# Altium PCB quark_dog_control.PcbDoc (part 2 of 2)
Units mm, origin at the board's own origin, x right, y up, seen from the top; angles counter-clockwise.
Board outline 100 x 60 mm, 4 copper layers (Top Layer 1, GND, VCC, Bottom Layer 1), stack 0.603 mm thick; 105 components, 131 nets, 600 pads, 305 vias.
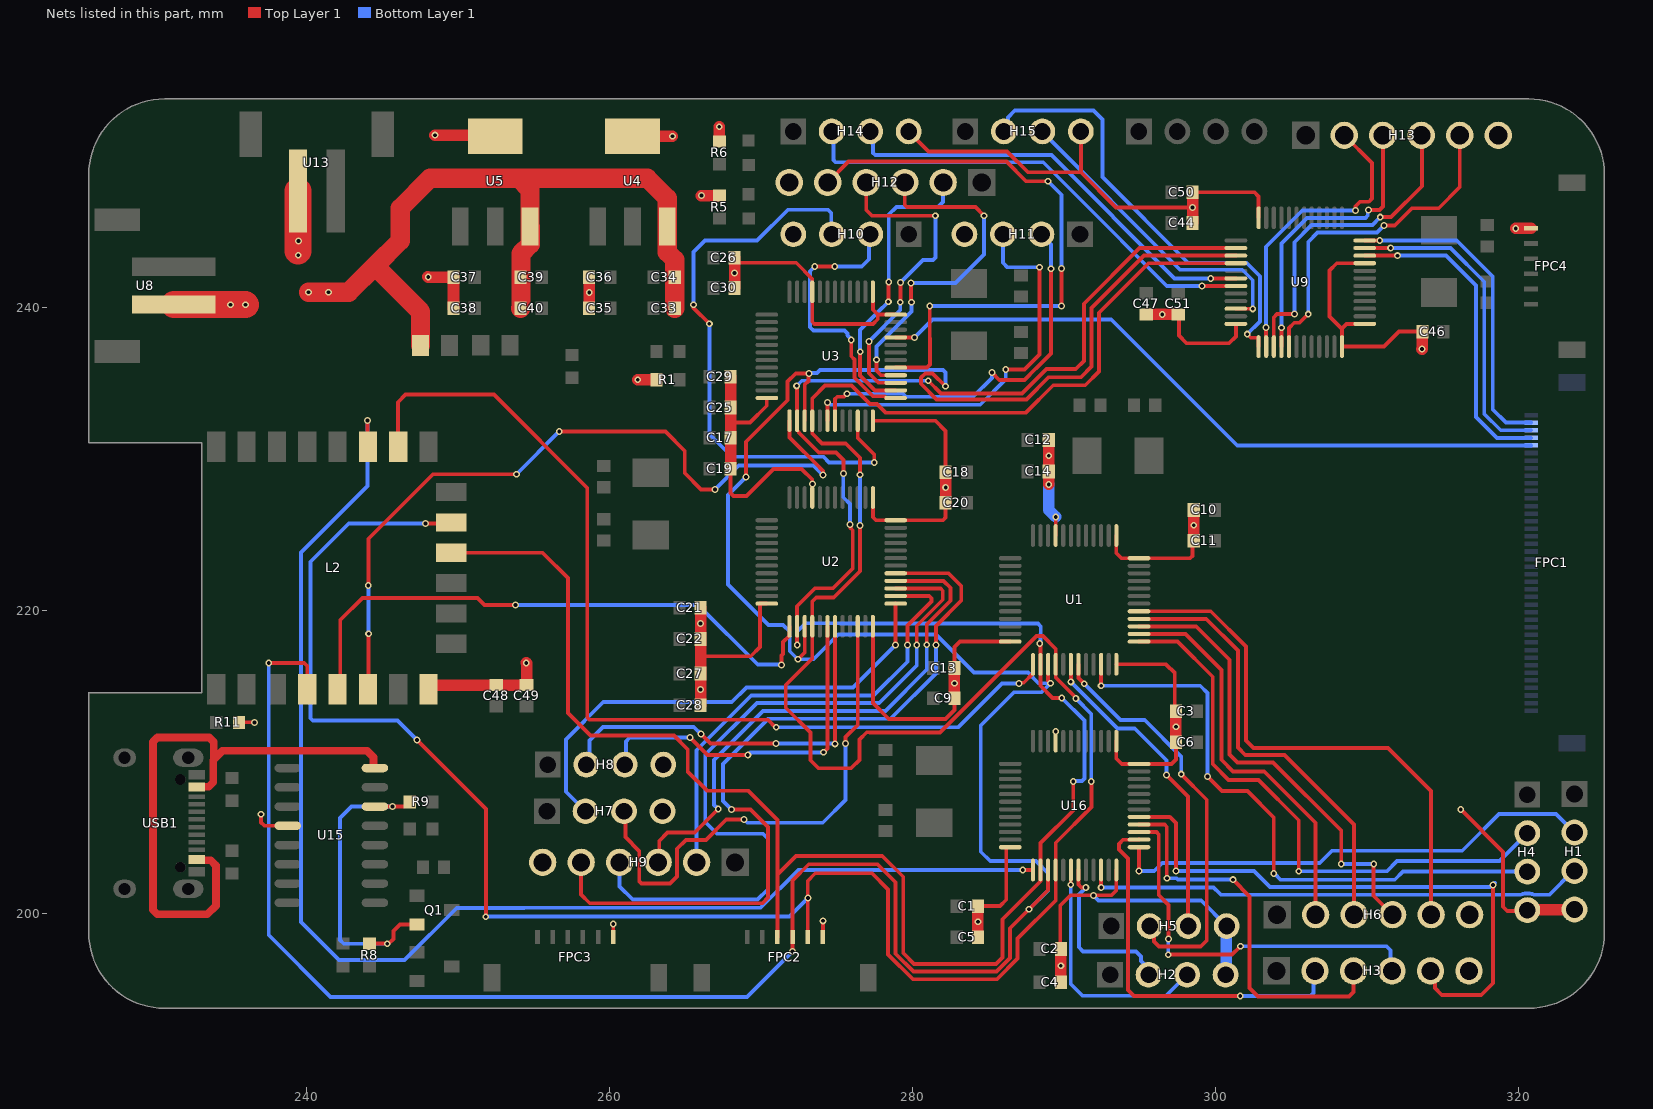
[diagram p4: the nets of this part, all layers, seen from the top]

## Via types
v1: diameter 0.45, hole 0.25, Top Layer 1 to Bottom Layer 1, tented both sides, 301 vias
v2: diameter 2, hole 2, Top Layer 1 to Bottom Layer 1, 4 vias

## Nets (pads, with @x,y where several pads share a name; then routed paths per layer and width w, separated by ;. In a path a pad name is that pad's centre, name@x,y a point inside that pad or via, vN(x,y) a via of type N, cw(c..) or ccw(c..) an arc to the next point about the centre after c; other vN are vias at no path point) (continued)
PWM12_3: FPC1.5 U3.45 | length 45.9
  Top Layer 1 w0.254: U3.45@278.88,238 280.11,238 v1(280.12,237.99)
  Bottom Layer 1 w0.254: v1(280.12,237.99) 281.31,239.18 293.11,239.18 301.42,230.87 FPC1.5@320.81,230.87
PWM13_1: FPC1.4 U9.10 | length 21
  Top Layer 1 w0.254: U9.10@309.83,243.39 v1(312,243.39)
  Bottom Layer 1 w0.254: v1(312,243.39) 315.2,243.39 317.18,241.41 317.18,232.736 318.546,231.37 FPC1.4@320.81,231.37
PWM13_2: FPC1.3 U9.11 | length 21.1
  Top Layer 1 w0.254: U9.11@309.83,243.89 v1(311.54,243.89)
  Bottom Layer 1 w0.254: v1(311.54,243.89) 315.5,243.89 317.72,241.67 317.72,232.95 318.8,231.87 FPC1.3@320.81,231.87
PWM13_3: FPC1.2 U9.12 | length 21.1
  Top Layer 1 w0.254: U9.12@309.83,244.39 v1(310.82,244.39)
  Bottom Layer 1 w0.254: v1(310.82,244.39) 315.9,244.39 318.28,242.01 318.28,233.23 319.14,232.37 FPC1.2@320.81,232.37
RTS: Q1.2 R8.2 R9.2 U15.14 | length 21.4
  Top Layer 1 w0.254: R8.2@244.17,197.996 245.436,197.996 245.75,198.31 245.75,198.83 246.18,199.26 Q1.2@247.29,199.26 ; U15.14@244.523,207.045 246.405,207.045 246.42,207.06 246.541,207.06 246.817,207.336 R9.2@246.817,207.35
  Bottom Layer 1 w0.254: v1(245.34,197.99) 242.47,197.99 242.22,198.24 242.22,206.28 242.98,207.04 v1(245.69,207.04)
SPI_CS1: L2.17 U16.25 | length 88.4
  Top Layer 1 w0.254: v1(244.03,232.52) 244.03,230.82 L2.17@244.06,230.79 ; v1(287.27,202.86) U16.25@287.94,202.86
  Bottom Layer 1 w0.254: v1(244.03,232.52) 244.03,228.19 239.65,223.81 239.65,199.43 242.16,196.92 246.48,196.92 249.92,200.36 254.36,200.36 254.37,200.37 269.97,200.37 272.46,202.86 v1(287.27,202.86)
SPI_CS1_1: H3.2 U16.38 | length 25.3
  Top Layer 1 w0.254: U16.38@294.94,204.86 294.937,204.857 293.897,204.857 293.61,204.57 293.61,204.22 294.22,203.61 294.22,194.93 294.6,194.55 v1(301.62,194.55)
  Bottom Layer 1 w0.254: v1(301.62,194.55) 306.26,194.55 306.45,194.74 306.45,196.1 H3.2@306.55,196.2
SPI_CS2: L2.16 U1.25 | length 65.1
  Top Layer 1 w0.254: L2.16@246.06,230.79 246.05,230.8 246.05,233.72 246.55,234.22 252.38,234.22 258.53,228.07 258.53,212.919 258.679,212.77 270.463,212.77 270.963,212.27 v1(271,212.27) ; v1(287.022,215.169) 287.06,215.207 287.335,215.207 287.94,215.812 U1.25@287.94,216.427
  Bottom Layer 1 w0.254: v1(271,212.27) 283,212.27 285.899,215.169 v1(287.022,215.169)
SPI_CS2_1: H6.2 U1.38 | length 26.3
  Top Layer 1 w0.254: U1.38@294.94,218.427 298.013,218.427 300.38,216.06 300.38,210.13 301.15,209.36 303.2,209.36 306.59,205.97 H6.2@306.59,199.91
SPI_CS3: L2.5 U2.25 | length 38.9
  Top Layer 1 w0.254: L2.5@242.06,214.79 242.24,214.97 242.24,219.34 243.7,220.8 251.293,220.8 251.753,220.34 v1(253.8,220.34) ; v1(271.354,216.379) 271.354,217.016 271.45,217.112 271.45,217.889 271.875,218.313 271.875,218.928 U2.25@271.88,218.933
  Bottom Layer 1 w0.254: v1(253.8,220.34) 265.85,220.34 269.78,216.41 271.323,216.41 v1(271.354,216.379)
SPI_CS3_1: H9.2 U2.38 | length 31
  Top Layer 1 w0.254: U2.38@278.88,220.933 281.095,220.933 281.244,220.785 281.244,220.574 279.66,218.99 v1(279.66,217.694)
  Bottom Layer 1 w0.254: H9.2@265.75,203.36 265.75,210.759 269.351,214.36 277.42,214.36 279.66,216.6 v1(279.66,217.694)
SPI_CS4: L2.6 U3.25 | length 50.8
  Top Layer 1 w0.254: L2.6@244.06,214.79 244.111,214.841 v1(244.111,218.439) ; v1(244.09,221.62) 244.09,224.71 248.35,228.97 v1(253.86,228.97) ; v1(256.69,231.78) 263.7,231.78 264.97,230.51 264.97,229.05 266.05,227.97 v1(266.96,227.97) ; U3.25@271.88,232.5 271.88,231.4 273.88,229.4 273.88,229.39 274.09,229.18 v1(274.09,228.91)
  Bottom Layer 1 w0.254: v1@244.09,218.36 v1(244.09,221.62) ; v1(253.86,228.97) 256.67,231.78 v1(256.69,231.78) ; v1(266.96,227.97) 268.53,229.54 273.46,229.54 v1(274.09,228.91)
SPI_CS4_1: H12.2 U3.38 | length 19.4
  Top Layer 1 w0.254: v1(276.54,237.05) 276.54,235.49 277.53,234.5 U3.38@278.88,234.5 ; v1(278.4,240.35) 278.415,240.365 278.415,241.635 v1(278.43,241.65)
  Bottom Layer 1 w0.254: v1(276.54,237.05) 276.54,238.49 277.681,239.631 v1(278.4,240.35) ; v1(278.43,241.65) 278.43,246.11 278.93,246.61 281.68,246.61 282.009,246.939 282.009,248.209 H12.2@282.02,248.22
SPI_CS5_1: H13.2 U9.38 | length 20
  Top Layer 1 w0.254: v1(303.32,238.64) 303.327,238.633 303.327,237.393 U9.38@303.33,237.39 ; H13.2@308.48,251.33 310.31,249.5 310.31,247.158 310.1,246.948 309.518,246.948 309.22,246.65 v1(309.22,246.37)
  Bottom Layer 1 w0.254: v1(303.32,238.64) 303.32,243.98 305.71,246.37 v1(309.22,246.37)
SPI_MISO: FPC2.4 L2.4 U1.27 U2.27 U3.27 U9.27 U16.27 | length 203.6
  Top Layer 1 w0.254: v1(237.52,216.51) 239.86,216.51 240.06,216.31 L2.4@240.06,214.79 ; v1(269.01,228.79) 269.01,231.11 271.75,233.85 271.75,235.08 272.289,235.619 v1(273.16,235.619) 273.122,235.581 273.122,235.129 272.88,234.886 U3.27@272.88,232.5 ; v1(272.07,197.47) 272.08,197.48 FPC2.4@272.08,198.44 272.08,202.17 273.15,203.24 277.69,203.24 278.88,202.05 278.88,197.33 280.059,196.151 285.53,196.151 286.43,197.051 286.43,199.012 v1(287.685,200.267) 288.94,201.522 U16.27@288.94,202.86 ; v1(272.44,216.76) 272.88,217.2 U2.27@272.88,218.933 ; v1(282.17,234.769) 281.32,235.619 280.832,235.619 280.551,235.338 280.551,234.942 281.584,233.909 287.509,233.909 288.97,235.37 291.11,235.37 291.81,236.07 291.81,239.94 295.26,243.39 U9.27@301.33,243.39 ; U1.27@288.94,216.427 288.94,215.34 v1(289.1,215.18)
  Bottom Layer 1 w0.254: v1(237.52,216.51) 237.52,198.56 241.6,194.48 269.08,194.48 v1(272.07,197.47) ; v1(269.01,228.79) 267.83,227.61 267.83,221.7 270.5,219.03 271.44,219.03 271.89,218.58 271.89,217.29 272.42,216.76 v1(272.44,216.76) 273.46,216.76 275.09,218.39 281.55,218.39 284.061,215.879 287.605,215.879 288.304,215.18 v1(289.1,215.18) 288.5,214.58 286.7,214.58 284.5,212.38 284.5,204.062 285.122,203.44 288.13,203.44 288.93,202.64 288.93,201.512 v1(287.685,200.267) ; v1(273.16,235.619) 273.198,235.657 273.7,235.657 273.893,235.85 282.011,235.85 282.17,235.691 v1(282.17,234.769)
SPI_MISO1_1: H3.3 U16.40 | length 25.9
  Top Layer 1 w0.254: U16.40@294.94,205.86 296.621,205.86 296.77,205.711 296.77,202.321 v1(296.78,202.311) ; v1(301.13,202.22) 302.23,201.12 302.23,195.08 302.79,194.52 308.79,194.52 309.08,194.81 309.08,196.19 H3.3@309.09,196.2
  Bottom Layer 1 w0.254: v1(296.78,202.311) 297.422,202.311 297.513,202.22 v1(301.13,202.22)
SPI_MISO2_1: H6.3 U1.40 | length 29.5
  Top Layer 1 w0.254: U1.40@294.94,219.427 299.373,219.427 301.46,217.34 301.46,210.93 301.95,210.44 304.54,210.44 309.13,205.85 H6.3@309.13,199.91
SPI_MISO3_1: H9.3 U2.40 | length 35.9
  Top Layer 1 w0.254: H9.3@263.21,203.36 263.28,203.43 263.28,204.77 263.83,205.32 265.622,205.32 v1(267.176,206.874) ; U2.40@278.88,221.933 282.047,221.933 282.501,221.479 282.501,220.621 280.93,219.05 v1(280.93,217.72)
  Bottom Layer 1 w0.254: v1(267.176,206.874) 266.9,207.15 266.9,210.113 270.137,213.35 278.206,213.35 280.93,216.074 v1(280.93,217.72)
SPI_MISO4_1: H12.3 U3.40 | length 23.3
  Top Layer 1 w0.254: v1(277.61,236.52) 277.61,235.81 277.917,235.503 278.877,235.503 U3.40@278.88,235.5 ; H12.3@279.48,248.22 279.48,246.739 279.629,246.59 284.14,246.59 v1(284.71,246.02) ; v1(279.89,241.58) 279.89,240.34 v1(279.92,240.31)
  Bottom Layer 1 w0.254: v1(277.61,236.52) 277.61,237.4 279.92,239.71 v1(279.92,240.31) ; v1(279.89,241.58) 282.83,241.58 284.71,243.46 v1(284.71,246.02)
SPI_MISO5_1: H13.3 U9.40 | length 19.4
  Top Layer 1 w0.254: U9.40@304.33,237.39 304.333,237.393 304.333,238.623 v1(304.34,238.63) ; v1@310.06,246.39 v1(310.069,246.399) 310.079,246.409 310.813,246.409 311.03,246.626 311.03,251.32 H13.3@311.02,251.33
  Bottom Layer 1 w0.254: v1(304.34,238.63) 304.34,244.2 306.02,245.88 309.883,245.88 310.032,246.029 310.032,246.362 v1(310.069,246.399)
SPI_MOSI: FPC2.5 L2.13 U1.28 U2.28 U3.28 U9.28 U16.28 | length 196.8
  Top Layer 1 w0.254: v1(247.3,211.43) 251.86,206.87 251.86,199.79 v1(251.84,199.77) ; v1(247.87,225.72) 249.49,225.72 L2.13@249.56,225.79 ; FPC2.5@273.08,198.44 273.08,201 273.08,202.14 273.58,202.64 277.32,202.64 278.38,201.58 278.38,197.291 280.02,195.651 285.568,195.651 286.93,197.012 286.93,198.34 289.44,200.85 U16.28@289.44,202.86 289.44,204.65 291.8,207.01 291.8,208.68 v1(291.79,208.69) ; v1(276.528,225.578) 276.528,222.568 274.8,220.84 273.64,220.84 273.38,220.58 U2.28@273.38,218.933 273.38,216.82 271.63,215.07 271.63,213.56 273.26,211.93 273.26,210.1 273.79,209.57 275.94,209.57 276.49,210.12 276.49,211.46 276.975,211.945 277.185,211.945 277.2,211.93 281.81,211.93 288.168,218.288 288.592,218.288 289.44,217.44 U1.28@289.44,216.427 289.443,216.424 289.443,215.557 290.732,214.268 290.732,214.208 v1(290.77,214.17) ; v1(276.53,228.93) 276.53,230.06 275.59,231 274.03,231 273.38,231.65 U3.28@273.38,232.5 273.38,233.97 274.23,234.82 275.97,234.82 277.19,233.6 277.66,233.6 278.24,233.02 287.46,233.02 289.28,234.84 291.39,234.84 292.3,235.75 292.3,239.62 295.57,242.89 U9.28@301.33,242.89
  Bottom Layer 1 w0.254: v1(247.3,211.43) 246.01,212.72 240.42,212.72 240.271,212.869 240.271,223.191 242.8,225.72 v1(247.87,225.72) ; v1(251.84,199.77) 251.85,199.78 271.88,199.78 v1(273.1,201) ; v1@276.529,225.579 v1(276.53,228.93) ; v1(290.77,214.17) 291.79,213.15 v1(291.79,208.69)
SPI_MOSI1_1: H3.4 U16.39 | length 26
  Top Layer 1 w0.254: U16.39@294.94,205.36 296.08,205.36 296.24,205.2 296.24,201.2 296.89,200.55 v1(296.89,198.31) ; v1(296.87,197.27) 301.07,197.27 v1(301.63,197.83)
  Bottom Layer 1 w0.254: v1(296.87,197.27) 296.87,198.29 v1(296.89,198.31) ; v1(301.63,197.83) 311.26,197.83 311.53,197.56 311.53,196.3 H3.4@311.63,196.2
SPI_MOSI2_1: H6.4 U1.39 | length 30.8
  Top Layer 1 w0.254: U1.39@294.94,218.927 298.713,218.927 300.91,216.73 300.91,210.47 301.43,209.95 303.79,209.95 308.28,205.46 v1(308.28,203.249) ; v1(310.42,203.249) 310.42,201.16 H6.4@311.67,199.91
  Bottom Layer 1 w0.254: v1(308.28,203.249) v1(310.42,203.249)
SPI_MOSI3_1: H9.4 U2.39 | length 49.6
  Top Layer 1 w0.254: U2.39@278.88,221.433 281.841,221.433 281.99,221.284 281.99,220.69 280.27,218.97 v1(280.27,217.697)
  Bottom Layer 1 w0.254: H9.4@260.67,203.36 260.67,201.769 261.539,200.9 269.76,200.9 270.45,201.59 270.45,204.94 270.14,205.25 267.09,205.25 266.32,206.02 266.32,210.466 269.734,213.88 277.803,213.88 280.27,216.347 v1(280.27,217.697)
SPI_MOSI4_1: H12.4 U3.39 | length 21.2
  Top Layer 1 w0.254: H12.4@276.94,248.22 276.94,246.4 277.32,246.02 v1(281.5,246.02) ; v1(277.12,237.73) 277.12,235.627 277.747,235 U3.39@278.88,235 ; v1(279.18,240.32) 279.2,240.34 v1(279.2,241.62)
  Bottom Layer 1 w0.254: v1(277.12,237.73) 279.18,239.79 v1(279.18,240.32) ; v1(279.2,241.62) 280.69,243.11 281.351,243.11 281.5,243.259 v1(281.5,246.02)
SPI_MOSI5_1: H13.4 U9.39 | length 21.4
  Top Layer 1 w0.254: U9.39@303.83,237.39 303.83,239.32 304.05,239.54 v1(305.19,239.54) ; v1(310.853,245.93) 311.56,245.93 313.6,247.97 313.6,251.29 H13.4@313.56,251.33
  Bottom Layer 1 w0.254: v1(305.19,239.54) 305.19,244.27 306.33,245.41 310.333,245.41 v1(310.853,245.93)
SPI_SCK: FPC2.3 L2.12 U1.26 U2.26 U3.26 U9.26 U16.26 | length 164.5
  Top Layer 1 w0.254: L2.12@249.56,223.79 253.637,223.79 255.59,223.79 257.26,222.12 257.26,213.22 258.76,211.72 264.26,211.72 265.16,210.82 265.16,209.36 266.43,208.09 269.15,208.09 271.08,206.16 271.08,202.57 ; FPC2.3@271.08,198.44 271.08,202.57 ; v1(272.35,234.8) 272.377,234.773 272.377,232.503 U3.26@272.38,232.5 272.38,231.881 272.491,231.77 272.491,231.724 273.805,230.41 274.94,230.41 275.44,229.91 v1(275.44,229.01) ; v1(272.385,217.705) 272.383,217.708 272.383,218.931 U2.26@272.38,218.933 272.38,220.26 273.57,221.45 274.75,221.45 276.05,222.75 276.05,225.27 275.9,225.42 275.9,225.621 v1(275.862,225.658) ; v1(281.03,235.14) 281.88,234.29 287.22,234.29 288.83,235.9 290.76,235.9 291.3,236.44 291.3,240.22 294.97,243.89 U9.26@301.33,243.89 ; v1(288.394,217.809) 288.394,217.756 288.44,217.709 288.44,215.01 289.24,214.21 v1(289.84,214.21) ; v1(290.598,208.698) 290.598,206.788 288.44,204.63 U16.26@288.44,202.86 288.437,202.857 288.437,202.117 285.93,199.61 285.93,197.09 285.491,196.651 280.098,196.651 279.38,197.369 279.38,202.41 278,203.79 272.3,203.79 271.08,202.57
  Bottom Layer 1 w0.254: v1(272.35,234.8) 272.69,235.14 v1(281.03,235.14) ; v1(272.385,217.705) 272.37,217.721 272.37,218.59 272.92,219.14 275.22,219.14 275.24,219.12 288.27,219.12 288.45,218.94 288.45,218.429 288.431,218.41 288.431,217.847 v1(288.394,217.809) ; v1(275.44,229.01) 275.42,228.99 275.42,227.45 275.862,227.008 v1(275.862,225.658) ; v1(289.84,214.21) 291.34,212.71 291.34,208.89 291.185,208.735 290.635,208.735 v1(290.598,208.698)
SPI_SCK1_1: H3.5 U16.41 | length 39.5
  Top Layer 1 w0.254: U16.41@294.94,206.36 296.97,206.36 297.38,205.95 297.38,202.8 v1(297.37,202.79) ; H3.5@314.17,196.2 314.466,195.904 314.466,195.064 314.91,194.62 317.52,194.62 318.285,195.385 v1(318.285,201.875)
  Bottom Layer 1 w0.254: v1(297.37,202.79) 302.516,202.79 303.576,201.73 318.14,201.73 v1(318.285,201.875) v1@318.43,202.02
SPI_SCK2_1: H6.5 U1.41 | length 36
  Top Layer 1 w0.254: U1.41@294.94,219.927 299.673,219.927 302,217.6 302,211.41 302.5,210.91 311.37,210.91 314.21,208.07 H6.5@314.21,199.91
SPI_SCK3_1: H9.5 U2.41 | length 53.3
  Top Layer 1 w0.254: H9.5@258.13,203.36 258.13,201.23 258.7,200.66 270.09,200.66 270.46,201.03 270.46,205.7 269.31,206.85 v1(268.05,206.85) ; U2.41@278.88,222.433 282.367,222.433 283.206,221.594 283.206,220.626 281.54,218.96 v1(281.54,217.701)
  Bottom Layer 1 w0.254: v1(268.05,206.85) 267.5,207.4 267.5,209.85 270.49,212.84 278.559,212.84 281.54,215.821 v1(281.54,217.701)
SPI_SCK4_1: H12.5 U3.41 | length 39.2
  Top Layer 1 w0.254: H12.5@274.4,248.22 275.78,249.6 286.19,249.6 287.49,248.3 v1(288.93,248.3) ; U3.41@278.88,236 280.674,236 280.685,236.012 280.942,236.012 281.14,236.21 281.14,237.93 281.13,237.94 v1(281.13,240.07) v1@281.12,240.08 ; v1(289.82,240.07) v1(289.82,242.54)
  Bottom Layer 1 w0.254: v1(281.13,240.07) v1(289.82,240.07) ; v1(288.93,248.3) 289.82,247.41 v1(289.82,242.54)
SPI_SCK5_1: H13.5 U9.41 | length 22.6
  Top Layer 1 w0.254: U9.41@304.83,237.39 304.83,238.61 305.18,238.96 305.53,238.96 v1(306.1,239.53) ; v1(311.11,245.37) 311.81,245.37 312.96,246.52 314.71,246.52 316.1,247.91 H13.5@316.1,251.33
  Bottom Layer 1 w0.254: v1(306.1,239.53) 306.1,244.29 306.72,244.91 310.65,244.91 v1(311.11,245.37)
STM32_RX_1: H2.2 U16.31 | length 11.4
  Top Layer 1 w0.254: U16.31@290.94,202.86 290.943,202.857 290.943,201.897 291.13,201.71 v1(291.43,201.71) v1@291.44,201.72
  Bottom Layer 1 w0.254: v1(291.43,201.71) 290.97,201.25 290.97,197.76 291.24,197.49 294.73,197.49 295.06,197.16 295.06,196.848 295.57,196.337 H2.2@295.57,195.946
STM32_RX_2: H5.2 U1.31 | length 27.6
  Top Layer 1 w0.254: U1.31@290.94,216.427 290.943,216.424 290.943,215.527 v1(291.32,215.15) ; H5.2@295.64,199.16 295.917,198.883 295.917,198.133 296.25,197.8 299.01,197.8 299.41,198.2 299.41,207.49 v1(297.72,209.18)
  Bottom Layer 1 w0.254: v1(291.32,215.15) 293.72,212.75 295.32,212.75 297.72,210.35 v1(297.72,209.18)
STM32_RX_3: H8.2 U2.31 | length 26.5
  Top Layer 1 w0.254: v1(266.04,211.82) 266.66,211.2 v1(270.98,211.2) ; v1(274.88,211.18) U2.31@274.88,218.933
  Bottom Layer 1 w0.254: H8.2@258.47,209.81 258.68,210.02 258.68,211.4 259.58,212.3 265.56,212.3 v1(266.04,211.82) ; v1(270.98,211.2) 274.86,211.2 v1(274.88,211.18)
STM32_RX_4: H11.2 U3.31 | length 25.8
  Top Layer 1 w0.254: U3.31@274.88,232.5 274.88,233.93 275.03,234.08 275.48,234.08 v1(275.68,234.28) ; v1(285.23,235.68) 285.72,235.19 287.381,235.19 288.161,235.97 288.17,235.97 289.13,236.93 v1(289.13,242.53)
  Bottom Layer 1 w0.254: v1(275.68,234.28) 279.367,234.28 279.566,234.081 283.996,234.081 285.23,235.315 v1(285.23,235.68) ; H11.2@288.5,244.8 288.5,244.77 289.13,244.14 v1(289.13,242.53)
STM32_RX_5: H14.2 U9.31 | length 31.9
  Top Layer 1 w0.254: v1(299.1,241.39) U9.31@301.33,241.39
  Bottom Layer 1 w0.254: H14.2@274.66,251.584 274.77,251.474 274.77,249.699 274.919,249.55 288.62,249.55 293.8,244.37 293.8,244.361 296.771,241.39 v1(299.1,241.39)
STM32_TX_1: H2.3 U16.30 | length 16.1
  Top Layer 1 w0.254: v1(290.436,201.887) v1(290.436,201.887) 290.437,202.857 U16.30@290.44,202.86
  Bottom Layer 1 w0.254: v1(290.436,201.887) 290.436,195.344 291.22,194.56 296.724,194.56 H2.3@298.11,195.946
STM32_TX_2: H5.3 U1.30 | length 21.1
  Top Layer 1 w0.254: v1(290.44,215.27) U1.30@290.44,216.427 ; v1(296.76,209.13) 298.18,207.71 H5.3@298.18,199.16
  Bottom Layer 1 w0.254: v1(290.44,215.27) 293.51,212.2 294.66,212.2 296.76,210.1 v1(296.76,209.13)
STM32_TX_3: H8.3 U2.30 | length 23.7
  Top Layer 1 w0.254: v1(265.32,211.6) 266.47,210.45 v1(269.13,210.45) ; v1(274.12,210.62) 274.38,210.88 U2.30@274.38,218.933
  Bottom Layer 1 w0.254: H8.3@261.01,209.81 261.08,209.88 261.08,211.34 261.34,211.6 v1(265.32,211.6) ; v1(269.13,210.45) 269.3,210.62 v1(274.12,210.62)
STM32_TX_4: H11.3 U3.30 | length 27.2
  Top Layer 1 w0.254: v1@274.37,233.71 v1(274.38,233.7) U3.30@274.38,232.5 ; v1(286.15,235.87) 287.38,235.87 288.38,236.87 v1(288.38,242.62)
  Bottom Layer 1 w0.254: v1(274.38,233.7) 274.433,233.7 274.583,233.55 284.46,233.55 286.15,235.24 v1(286.15,235.87) ; H11.3@285.96,244.8 285.96,242.92 286.26,242.62 v1(288.38,242.62)
STM32_TX_5: H14.3 U9.30 | length 28.9
  Top Layer 1 w0.254: v1(299.67,241.89) U9.30@301.33,241.89
  Bottom Layer 1 w0.254: H14.3@277.2,251.584 277.39,251.394 277.39,250.17 277.54,250.02 289.16,250.02 297.29,241.89 v1(299.67,241.89)
SWCLK1: H1.2 U16.37 | length 32.5
  Top Layer 1 w0.254: v1@294.92,202.69 294.94,202.71 U16.37@294.94,204.36
  Bottom Layer 1 w0.254: v1(294.94,202.79) 295.946,202.79 296.466,203.31 306.86,203.31 307.68,204.13 316.26,204.13 318.69,206.56 322.44,206.56 H1.2@323.67,205.33
SWCLK2: H4.2 U1.37 | length 38.3
  Top Layer 1 w0.254: U1.37@294.94,217.927 297.483,217.927 299.8,215.61 299.8,209.85 300.85,208.8 302.82,208.8 305.48,206.14 v1(305.48,202.77)
  Bottom Layer 1 w0.254: v1(305.48,202.77) 311.29,202.77 311.97,203.45 318.72,203.45 H4.2@320.56,205.29
SWCLK3: H7.2 U2.37 | length 32.4
  Top Layer 1 w0.254: U2.37@278.88,220.433 v1(278.88,217.7) v1@278.89,217.69
  Bottom Layer 1 w0.254: H7.2@258.42,206.73 257.13,208.02 257.13,211.47 259.59,213.93 268.07,213.93 269.03,214.89 276.07,214.89 v1(278.88,217.7)
SWCLK4: H10.2 U3.37 | length 18.6
  Top Layer 1 w0.254: v1(273.545,242.675) v1(274.86,242.675) ; v1(275.95,237.831) 275.95,236.755 276.159,236.546 276.159,235.332 277.38,234.111 278.15,234.111 278.261,234 U3.37@278.88,234
  Bottom Layer 1 w0.254: v1(273.545,242.675) 273.23,242.36 273.23,238.67 273.45,238.45 275.51,238.45 275.701,238.259 275.701,238.133 275.95,237.884 v1(275.95,237.831) ; v1(274.86,242.675) 276.645,242.675 277.12,243.15 277.12,244.71 H10.2@277.21,244.8
SWCLK5: H15.2 U9.37 | length 30.2
  Top Layer 1 w0.254: v1(302.08,238.21) 302.314,237.976 302.823,237.976 302.83,237.969 U9.37@302.83,237.39
  Bottom Layer 1 w0.254: H15.2@286.02,251.584 286.297,251.861 286.297,252.517 286.74,252.96 291.94,252.96 292.52,252.38 292.52,248.57 298.19,242.9 302.05,242.9 302.92,242.03 302.92,239.05 v1(302.08,238.21)
SWDIO1: H1.3 U16.34 | length 33.3
  Top Layer 1 w0.254: v1@292.43,201.69 v1(292.44,201.7) U16.34@292.44,202.86
  Bottom Layer 1 w0.254: v1(292.44,201.7) 299.857,201.7 300.263,201.294 300.337,201.22 320.114,201.22 cw(c320.56,200.21) 321.006,201.22 322.01,201.22 323.58,202.79 H1.3@323.67,202.79
SWDIO2: H4.3 U1.34 | length 40.5
  Top Layer 1 w0.254: v1(292.44,215.01) U1.34@292.44,216.427 ; v1(299.46,209.02) 300.42,208.06 302.1,208.06 303.83,206.33 v1(303.83,202.62)
  Bottom Layer 1 w0.254: v1(292.44,215.01) 298.98,215.01 299.46,214.53 v1(299.46,209.02) ; v1(303.83,202.62) 303.867,202.62 304.277,202.21 311.806,202.21 312.346,202.75 H4.3@320.56,202.75
SWDIO3: H7.3 U2.34 | length 34
  Top Layer 1 w0.254: H7.3@260.96,206.73 261.05,206.64 261.05,205.03 261.96,204.12 261.96,202.12 262.12,201.96 263.99,201.96 264.46,202.43 264.46,204.26 265.04,204.84 266.365,204.84 267.705,206.18 v1(268.88,206.18) ; v1(275.58,211.2) 275.58,211.63 276.38,212.43 U2.34@276.38,218.933
  Bottom Layer 1 w0.254: v1(268.88,206.18) 269.09,205.97 274.07,205.97 275.58,207.48 v1(275.58,211.2)
SWDIO4: H10.3 U3.34 | length 39
  Top Layer 1 w0.254: v1(265.55,240.15) 265.55,239.94 v1(266.59,238.9) ; U3.34@276.38,232.5 276.38,231.351 277.47,230.261 v1(277.47,229.75)
  Bottom Layer 1 w0.254: v1(265.55,240.15) 265.55,243.63 266.3,244.38 269.74,244.38 271.78,246.42 274.41,246.42 274.63,246.2 274.63,244.84 H10.3@274.67,244.8 ; v1(266.59,238.9) 266.6,238.89 266.6,231.61 268.09,230.12 274.12,230.12 274.49,229.75 v1(277.47,229.75)
SWDIO5: H15.3 U9.34 | length 21
  Top Layer 1 w0.254: U9.34@301.33,239.89 302.43,239.89 v1(302.44,239.88)
  Bottom Layer 1 w0.254: H15.3@288.56,251.584 288.56,251.55 297.65,242.46 301.75,242.46 302.44,241.77 v1(302.44,239.88)
VCC_3.3: C1.2 C2.2 C3.2 C4.2 C5.2 C6.2 C9.2 C10.2 C11.2 C12.2 C13.2 C14.2 C17.2 C18.2 C19.2 C20.2 C21.2 C22.2 C25.2 C26.2 C27.2 C28.2 C29.2 C30.2 C35.2 C36.2 C44.2 C46.2 C47.2 C50.2 C51.2 H1.4 H2.4 H4.4 H5.4 H7.4 H8.4 H10.4 H11.4 H14.4 H15.4 R1.1 R5.2 U1.1 U1.9 U1.24 U1.36 U1.48 U2.1 U2.9 U2.24 U2.36 U2.48 U3.1 U3.9 U3.24 U3.36 U3.48 U4.4 U9.1 U9.9 U9.24 U9.36 U9.48 U16.1 U16.9 U16.24 U16.36 U16.48 | length 225.1
  Top Layer 1 w0.254: 266.01,216.96 269.32,216.96 269.93,217.57 269.93,220.426 269.937,220.433 U2.24@270.38,220.433 ; C19.2@267.99,229.38 C19.2@267.99,229.33 267.99,227.74 268.19,227.54 269.05,227.54 270.83,229.32 272.68,229.32 273.38,228.62 U2.9@273.38,227.433 ; 267.99,232.374 269.27,232.374 270.38,233.484 U3.24@270.38,234 ; C26.2@268.254,243.198 268.527,242.925 268.67,242.925 268.676,242.92 272.32,242.92 273.38,241.86 U3.9@273.38,241 273.38,239.029 273.529,238.88 277.39,238.88 277.7,239.19 277.7,239.5 ; U2.36@277.38,218.933 277.38,213.87 278.43,212.82 282.161,212.82 282.76,213.419 C9.2@282.76,214.18 ; U2.1@277.38,227.433 277.38,226.13 277.577,225.933 U2.48@278.88,225.933 282.003,225.933 282.18,226.11 C20.2@282.18,227.08 ; U3.36@277.38,232.5 281.51,232.5 282.18,231.83 C18.2@282.18,229.09 ; U3.1@277.38,241 277.38,239.82 277.7,239.5 ; U3.48@278.88,239.5 277.7,239.5 ; H14.4@279.74,251.584 281.054,250.27 286.24,250.27 287.62,248.89 291.1,248.89 ; C13.2@282.76,216.18 282.76,217.56 283.127,217.927 U1.24@286.44,217.927 ; C1.2@284.31,200.47 285.76,200.47 286.18,200.89 286.18,204.353 286.187,204.36 U16.24@286.44,204.36 ; U1.9@289.44,224.927 v1(289.44,226.15) ; C2.2@289.78,197.647 289.74,197.687 289.74,200.51 290.42,201.19 293.13,201.19 293.44,201.5 U16.36@293.44,202.86 ; H15.4@291.1,251.584 291.1,248.89 ; U16.1@293.44,211.36 293.44,210.22 293.8,209.86 U16.48@294.94,209.86 297.08,209.86 297.37,210.15 C6.2@297.37,211.28 ; U1.36@293.44,216.427 296.723,216.427 297.3,215.85 297.3,213.4 C3.2@297.37,213.33 ; U1.1@293.44,224.927 293.44,223.76 293.773,223.427 U1.48@294.94,223.427 298.311,223.427 298.46,223.575 298.46,224.5 C11.2@298.55,224.59 ; C51.2@297.52,239.51 297.57,239.46 297.57,238.11 298.07,237.61 300.88,237.61 301.33,238.06 U9.36@301.33,238.89 ; v1(298.47,246.559) 293.431,246.559 291.1,248.89 ; C50.2@298.47,247.57 302.56,247.57 302.83,247.3 U9.24@302.83,245.89 ; U9.1@309.83,238.89 308.63,238.89 308.33,238.59 ; U9.9@309.83,242.89 307.98,242.89 307.51,242.42 307.51,239.38 308.3,238.59 308.33,238.59 ; C46.2@313.63,238.38 312.09,238.38 311.1,237.39 U9.48@308.33,237.39 308.33,238.59 ; v1(316.17,206.84) 318.96,204.05 318.96,200.43 319.23,200.16 320.51,200.16 H4.4@320.56,200.21
  Top Layer 1 w0.762: C35.2@258.66,239.925 v1(258.66,240.95) C36.2@258.66,241.975 ; U4.4@261.52,251.26 264.14,251.26 v1(264.15,251.27) ; v1@261.86,235.19 v1(261.87,235.2) R1.1@263.107,235.2 ; C28.2@266.01,213.72 v1(266.01,214.77) C27.2@266.01,215.82 266.01,216.96 C22.2@266.01,218.1 v1(266.01,219.125) C21.2@266.01,220.15 ; v1(266.071,247.351) R5.2@267.26,247.351 ; C19.2@267.99,229.38 C17.2@267.99,231.378 267.99,232.374 C25.2@267.99,233.37 C29.2@267.99,235.41 ; C30.2@268.254,241.26 v1(268.254,242.254) C26.2@268.254,243.248 ; C20.2@282.18,227.08 v1(282.18,228.085) C18.2@282.18,229.09 ; C9.2@282.76,214.18 v1(282.76,215.18) C13.2@282.76,216.18 ; C5.2@284.31,198.42 v1(284.31,199.445) C1.2@284.31,200.47 ; v1(288.98,228.3) C14.2@288.98,229.15 v1(288.98,230.19) C12.2@288.98,231.23 ; C4.2@289.78,195.441 v1(289.78,196.544) C2.2@289.78,197.647 ; C47.2@295.42,239.51 v1(296.47,239.51) C51.2@297.52,239.51 ; C6.2@297.37,211.28 v1(297.37,212.305) C3.2@297.37,213.33 ; C44.2@298.47,245.548 v1(298.47,246.559) C50.2@298.47,247.57 ; C11.2@298.55,224.59 v1(298.55,225.6) C10.2@298.55,226.61 ; v1(313.611,237.231) v1(313.611,237.231) 313.611,238.361 C46.2@313.63,238.38 ; H4.4@320.56,200.21 320.58,200.23 323.65,200.23 H1.4@323.67,200.25
  Bottom Layer 1 w0.254: v1(291.94,201.17) 292.27,200.84 299.04,200.84 H5.4@300.72,199.16
  Bottom Layer 1 w0.762: v1(288.98,228.3) 288.98,226.61 v1(289.44,226.15) ; H2.4@300.65,195.946 300.685,195.981 300.685,199.125 H5.4@300.72,199.16
  other v1: 289.44,211.99 273.39,228.32
VCC_3.3_ESP32_SENSOR: C37.2 C38.2 C48.2 C49.2 FPC2.6 FPC3.6 FPC4.6 H3.6 H6.6 H9.6 H12.6 H13.6 L2.8 R6.1 R11.2 U5.4 U15.4 | length 23.2
  Top Layer 1 w0.254: R11.2@235.563,212.6 236.57,212.6 v1(236.58,212.59) ; v1(237.01,206.54) 237.01,206 237.235,205.775 U15.4@238.777,205.775 ; FPC3.6@260.25,198.44 v1(260.25,199.301) ; v1@274.073,199.508 v1(274.08,199.501) FPC2.6@274.08,198.44
  Top Layer 1 w0.762: v1@248.02,242 v1(248.045,241.975) C37.2@249.71,241.975 C38.2@249.71,239.925 ; L2.8@248.06,214.79 248.06,214.841 248.279,215.06 C48.2@252.52,215.06 C49.2@254.53,215.06 254.53,216.5 v1(254.51,216.52) ; v1(248.49,251.34) 252.38,251.34 U5.4@252.46,251.26 ; v1(267.24,251.9) 267.24,250.948 R6.1@267.26,250.928 ; v1(319.79,245.19) FPC4.6@320.8,245.19
VCC_5: U15.16 USB1.2 USB1.11 | length 39.6
  Top Layer 1 w0.508: USB1.11@232.76,203.54 232.806,203.494 233.696,203.494 234.04,203.15 234.04,200.5 233.47,199.93 230.176,199.93 229.878,200.228 229.878,211.302 230.176,211.6 233.592,211.6 233.89,211.302 233.89,210.14 ; USB1.2@232.76,208.34 233.552,208.34 233.85,208.638 233.85,209.66 233.85,210.1 234.47,210.72 244,210.72 244.43,210.29 244.43,209.609 244.454,209.585 U15.16@244.523,209.585
VIN: ?.2 C33.2 C34.2 C39.2 C40.2 U4.3 U5.3 U8.2 U13.2 | length 60.4
  Top Layer 1 w1.27: v1(240.14,240.97) 242.79,240.97 244.523,242.703 ; ?.2@247.524,237.47 247.524,239.702 244.523,242.703 ; C40.2@254.13,239.925 254.16,239.955 254.16,243.53 254.777,244.147 254.777,245.303 U5.3@254.76,245.32 254.76,247.746 254.016,248.49 ; C33.2@264.31,239.92 C34.2@264.31,241.97 264.31,243.12 263.82,243.61 U4.3@263.82,245.32 263.82,247.17 262.5,248.49 254.016,248.49 ; 244.523,242.703 246.19,244.37 246.19,246.52 248.16,248.49 254.016,248.49
  Top Layer 1 w1.778: U8.2@231.26,240.16 235.97,240.16 v1(235.98,240.15) ; U13.2@239.44,247.655 239.45,247.645 239.45,243.71
  other v1: 235,240.15 241.465,240.97 239.47,243.42 239.49,244.36
pads on no net: 1.1 ?.1 FPC1.1 FPC1.41 FPC1.42 FPC2.7 FPC2.8 FPC3.7 FPC3.8 FPC4.7 FPC4.8 L2.9 L2.10 L2.11 L2.14 U1.2 U1.3 U1.4 U1.13 U1.14 U1.15 U1.19 U1.20 U1.21 U1.22 U1.29 U1.32 U1.33 U1.46 U2.2 U2.3 U2.4 U2.13 U2.14 U2.15 U2.19 U2.20 U2.21 U2.22 U2.29 U2.32 U2.33 U2.46 U3.2 U3.3 U3.4 U3.13 U3.14 U3.15 U3.19 U3.20 U3.21 U3.22 U3.29 U3.32 U3.33 U3.46 U4.2 U5.2 U8.3 U8.4 U9.2 U9.3 U9.4 U9.13 U9.22 U9.29 U9.32 U9.33 U9.42 U9.43 U9.45 U9.46 U13.3 U13.4 U15.7 U15.8 U15.9 U15.10 U15.11 U15.12 U15.15 U16.2 U16.3 U16.4 U16.13 U16.14 U16.15 U16.19 U16.20 U16.21 U16.22 U16.29 U16.32 U16.33 U16.46 USB1. USB1.3 USB1.9
copper on no net: | length 100.3
  Top Layer 1 w0.254: v1(284.9,252.94) 284.91,252.93 v1(304.14,252.93) ; v1(302.82,244.49) 308.04,244.49 308.3,244.75 ; 308.33,244.78 308.33,245.89
  Top Layer 1 w0.508: 249.14,237.34 251.37,237.34
  Bottom Layer 1 w0.254: v1@250.55,237.2 250.55,236.92 249.99,236.36 243.93,236.36 243.32,236.97 243.32,245.47 247.15,249.3 247.15,251.2 248.89,252.94 v1(284.9,252.94) ; v1(302.82,244.49) 305.14,246.81 305.14,249.08 304.14,250.08 v1(304.14,252.93)
  other v1: 250.464,237.391
  other v2: 228.668,196.732 322.668,196.732 228.668,250.732 322.668,250.732

## Polygon pours and split planes (outlines as drawn)
DGND on GND (split plane): 320.937,253.214 321.23,253.185 321.52,253.137 321.806,253.07 322.087,252.985 322.362,252.881 322.63,252.76 322.889,252.622 323.139,252.466 323.378,252.295 323.605,252.109 323.819,251.908 324.02,251.693 324.207,251.466 324.378,251.227 324.533,250.977 324.672,250.718 324.793,250.45 324.897,250.175 324.982,249.894 325.049,249.608 325.097,249.318 325.125,249.025 325.134,248.773 325.133,248.772 325.132,248.737 325.129,248.702 325.129,198.74 325.129,198.734 325.129,198.728 325.134,198.689 325.125,198.438 325.097,198.145 325.049,197.855 324.982,197.569 324.897,197.288 324.793,197.013 324.672,196.745 324.533,196.486 324.378,196.236 324.207,195.997 324.02,195.77 323.819,195.555 323.605,195.354 323.378,195.168 323.139,194.997 322.889,194.841 322.63,194.703 322.362,194.582 322.087,194.478 321.806,194.393 321.52,194.326 321.23,194.278 320.937,194.249 320.676,194.241 320.675,194.241 320.591,194.246 320.575,194.246 320.559,194.247 230.643,194.247 230.586,194.241 230.349,194.249 230.057,194.278 229.767,194.326 229.481,194.393 229.199,194.478 228.924,194.582 228.657,194.703 228.397,194.841 228.148,194.997 227.909,195.168 227.682,195.354 227.467,195.555 227.266,195.77 227.08,195.997 226.908,196.236 226.753,196.486 226.615,196.745 226.493,197.013 226.39,197.288 226.304,197.569 226.238,197.855 226.19,198.145 226.161,198.438 226.152,198.714 226.154,198.731 226.154,214.05 233.1,214.05 233.2,214.059 233.295,214.088 233.384,214.136 233.461,214.199 233.471,214.209 233.534,214.286 233.582,214.375 233.611,214.47 233.62,214.57 233.62,231.05 233.611,231.15 233.582,231.245 233.534,231.334 233.471,231.411 233.394,231.474 233.305,231.522 233.21,231.551 233.11,231.56 226.154,231.56 226.154,248.731 226.152,248.749 226.161,249.025 226.19,249.318 226.238,249.608 226.304,249.894 226.39,250.175 226.493,250.45 226.615,250.718 226.753,250.977 226.908,251.227 227.08,251.466 227.266,251.693 227.467,251.908 227.682,252.109 227.909,252.295 228.148,252.466 228.397,252.622 228.657,252.76 228.924,252.881 229.199,252.985 229.481,253.07 229.767,253.137 230.057,253.185 230.349,253.214 230.626,253.223 230.643,253.221 320.643,253.221 320.661,253.223
PGND on GND (split plane): 243.216,250.557 243.216,245.02 243.224,244.98 243.247,244.947 243.787,244.407 243.82,244.384 243.86,244.376 255.717,244.376 256.876,243.217 256.876,239 256.884,238.96 256.907,238.927 257.747,238.087 257.764,238.076 257.78,238.064 257.82,238.056 260.759,238.056 260.799,238.064 260.832,238.087 261.713,238.968 261.736,239.001 261.744,239.041 261.744,243.117 262.003,243.376 263.257,243.376 263.516,243.117 263.516,238.813 260.707,236.004 256.163,236.004 254.614,237.553 254.614,240.96 254.606,241 254.583,241.033 252.113,243.503 252.08,243.526 252.04,243.534 241.04,243.534 241,243.526 240.967,243.503 238.897,241.434 228.433,241.434 228.184,241.683 228.184,243.88 228.184,245.797 233.193,250.806 242.967,250.806
VCC_3.3_ESP32_SENSOR on VCC (split plane): 320.937,253.214 321.23,253.185 321.52,253.137 321.806,253.07 322.087,252.985 322.362,252.881 322.63,252.76 322.889,252.622 323.139,252.466 323.378,252.295 323.605,252.109 323.819,251.908 324.02,251.693 324.207,251.466 324.378,251.227 324.533,250.977 324.672,250.718 324.793,250.45 324.897,250.175 324.982,249.894 325.049,249.608 325.097,249.318 325.125,249.025 325.134,248.773 325.133,248.772 325.132,248.737 325.129,248.702 325.129,198.74 325.129,198.734 325.129,198.728 325.134,198.689 325.125,198.438 325.097,198.145 325.049,197.855 324.982,197.569 324.897,197.288 324.793,197.013 324.672,196.745 324.533,196.486 324.378,196.236 324.207,195.997 324.02,195.77 323.819,195.555 323.605,195.354 323.378,195.168 323.139,194.997 322.889,194.841 322.63,194.703 322.362,194.582 322.087,194.478 321.806,194.393 321.52,194.326 321.23,194.278 320.937,194.249 320.676,194.241 320.675,194.241 320.591,194.246 320.575,194.246 320.559,194.247 230.643,194.247 230.586,194.241 230.349,194.249 230.057,194.278 229.767,194.326 229.481,194.393 229.199,194.478 228.924,194.582 228.657,194.703 228.397,194.841 228.148,194.997 227.909,195.168 227.682,195.354 227.467,195.555 227.266,195.77 227.08,195.997 226.908,196.236 226.753,196.486 226.615,196.745 226.493,197.013 226.39,197.288 226.304,197.569 226.238,197.855 226.19,198.145 226.161,198.438 226.152,198.714 226.154,198.731 226.154,214.05 233.1,214.05 233.2,214.059 233.295,214.088 233.384,214.136 233.461,214.199 233.471,214.209 233.534,214.286 233.582,214.375 233.611,214.47 233.62,214.57 233.62,231.05 233.611,231.15 233.582,231.245 233.534,231.334 233.471,231.411 233.394,231.474 233.305,231.522 233.21,231.551 233.11,231.56 226.154,231.56 226.154,248.731 226.152,248.749 226.161,249.025 226.19,249.318 226.238,249.608 226.304,249.894 226.39,250.175 226.493,250.45 226.615,250.718 226.753,250.977 226.908,251.227 227.08,251.466 227.266,251.693 227.467,251.908 227.682,252.109 227.909,252.295 228.148,252.466 228.397,252.622 228.657,252.76 228.924,252.881 229.199,252.985 229.481,253.07 229.767,253.137 230.057,253.185 230.349,253.214 230.626,253.223 230.643,253.221 320.643,253.221 320.661,253.223
VCC_3.3 on VCC (split plane): 266.126,251.217 266.126,249.13 266.134,249.09 266.157,249.057 268.757,246.457 268.774,246.446 268.79,246.434 268.83,246.426 290.711,246.426 290.751,246.434 290.785,246.457 294.584,250.256 316.597,250.256 318.926,247.927 318.926,204.768 314.362,200.204 296.02,200.204 295.98,200.196 295.964,200.184 295.947,200.173 291.337,195.564 281.653,195.564 276.803,200.413 276.77,200.436 276.73,200.444 260.923,200.444 256.544,204.823 256.544,227.69 256.536,227.73 256.524,227.746 256.513,227.763 250.853,233.423 250.82,233.446 250.78,233.454 231.555,233.454 229.894,235.115 229.894,236.536 254.29,236.536 254.33,236.544 254.363,236.567 256.843,239.047 256.866,239.08 256.874,239.12 256.874,248.317 260.803,252.246 265.097,252.246
VIN on VCC (split plane): 243.516,238.034 228.074,238.034 228.074,243.836 231.18,243.836 231.22,243.844 231.253,243.867 232.383,244.997 232.406,245.03 232.414,245.07 232.414,252.196 243.516,252.196

## Other copper
Top Layer 1:
GND (plane layer: these items are gaps in the copper):
  lines w0.203: 228.08,241.64 228.39,241.33 238.94,241.33 241.04,243.43 252.04,243.43 254.51,240.96 254.51,237.51 256.12,235.9 260.75,235.9 263.62,238.77 263.62,243.16 263.3,243.48 261.96,243.48 261.64,243.16 261.64,239.041 260.759,238.16 257.82,238.16 256.98,239 256.98,243.26 255.76,244.48 243.86,244.48 243.32,245.02 243.32,250.6 243.01,250.91 233.15,250.91 228.08,245.84 228.08,243.88 228.08,241.64
VCC (plane layer: these items are gaps in the copper):
  lines w0.203: 227.97,237.96 228,237.93 243.59,237.93 243.62,237.96 243.62,252.3 232.37,252.3 232.31,252.24 232.31,245.07 231.18,243.94 227.97,243.94 227.97,237.96 ; 229.79,235.072 229.79,236.64 254.29,236.64 256.77,239.12 256.77,248.36 260.76,252.35 265.14,252.35 266.23,251.26 266.23,249.13 268.83,246.53 290.711,246.53 294.541,250.36 316.64,250.36 319.03,247.97 319.03,204.725 314.405,200.1 296.02,200.1 291.38,195.46 281.61,195.46 276.73,200.34 260.88,200.34 256.44,204.78 256.44,227.69 250.78,233.35 231.512,233.35 229.79,235.072

## Silkscreen, mask and mechanical layers (free items; w line width, h text height)
Top Overlay:
  drawing of 1896 lines, arcs and shapes, not listed
  text "VIN+" at 234.836,247.424 h1.52 r90
  text "VIN-" at 247.896,247.294 h1.52 r90
  text "VIN-" at 227.084,247.094 h1.52
  text "VIN+" at 226.874,233.694 h1.52
Bottom Overlay:
  drawing of 3087 lines, arcs and shapes, not listed
Mechanical 1:
  lines w0.203: 230.643,193.731 cw(c230.643,198.731) 225.643,198.731 225.643,214.557 225.646,214.56 233.1,214.56 ; 230.643,193.737 320.559,193.737 ; 230.643,253.731 ccw(c230.643,248.731) 225.643,248.731 225.643,231.047 225.646,231.05 233.11,231.05 233.11,214.57 ; 230.669,253.731 320.661,253.731 ; 320.643,193.731 ccw(c320.643,198.731) 325.643,198.731 ; 320.643,253.731 cw(c320.643,248.731) 325.643,248.731 ; 325.639,198.74 325.639,248.702